# EAGLE board Eddy_ESC (EAGLE 9.5.2)
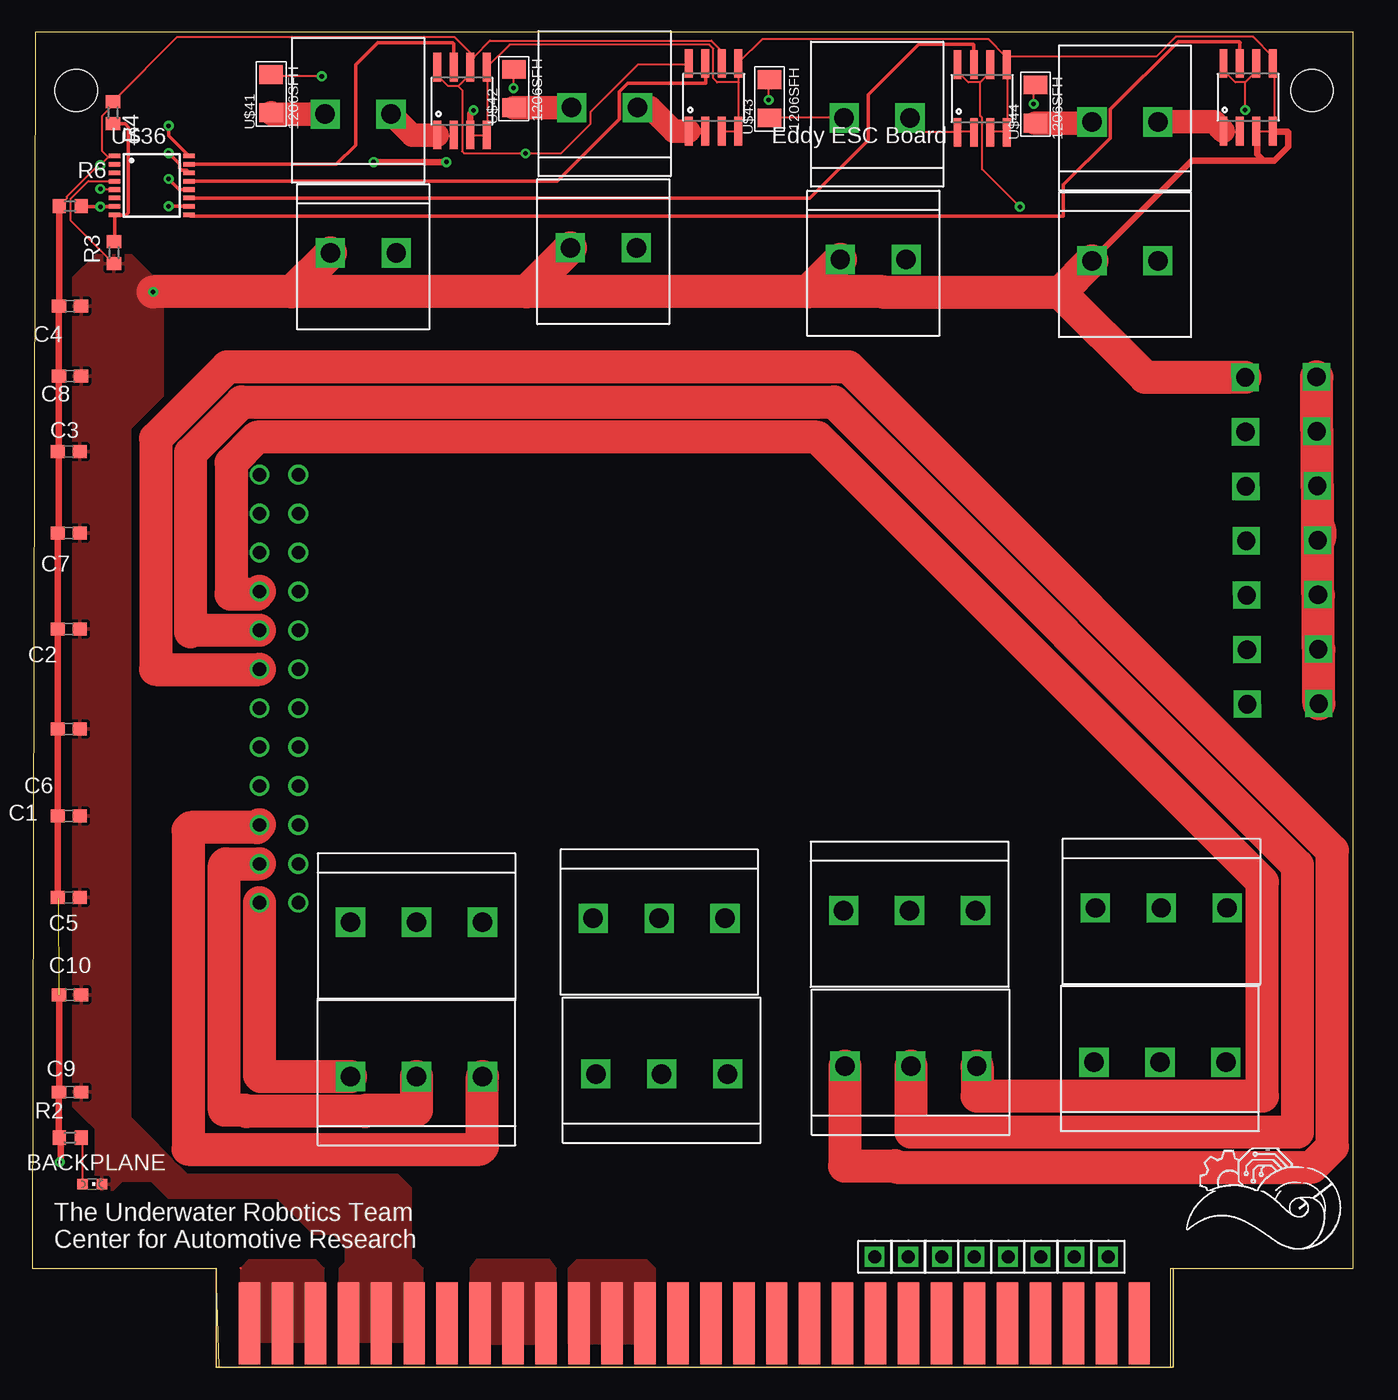
[diagram p0: board, top side]
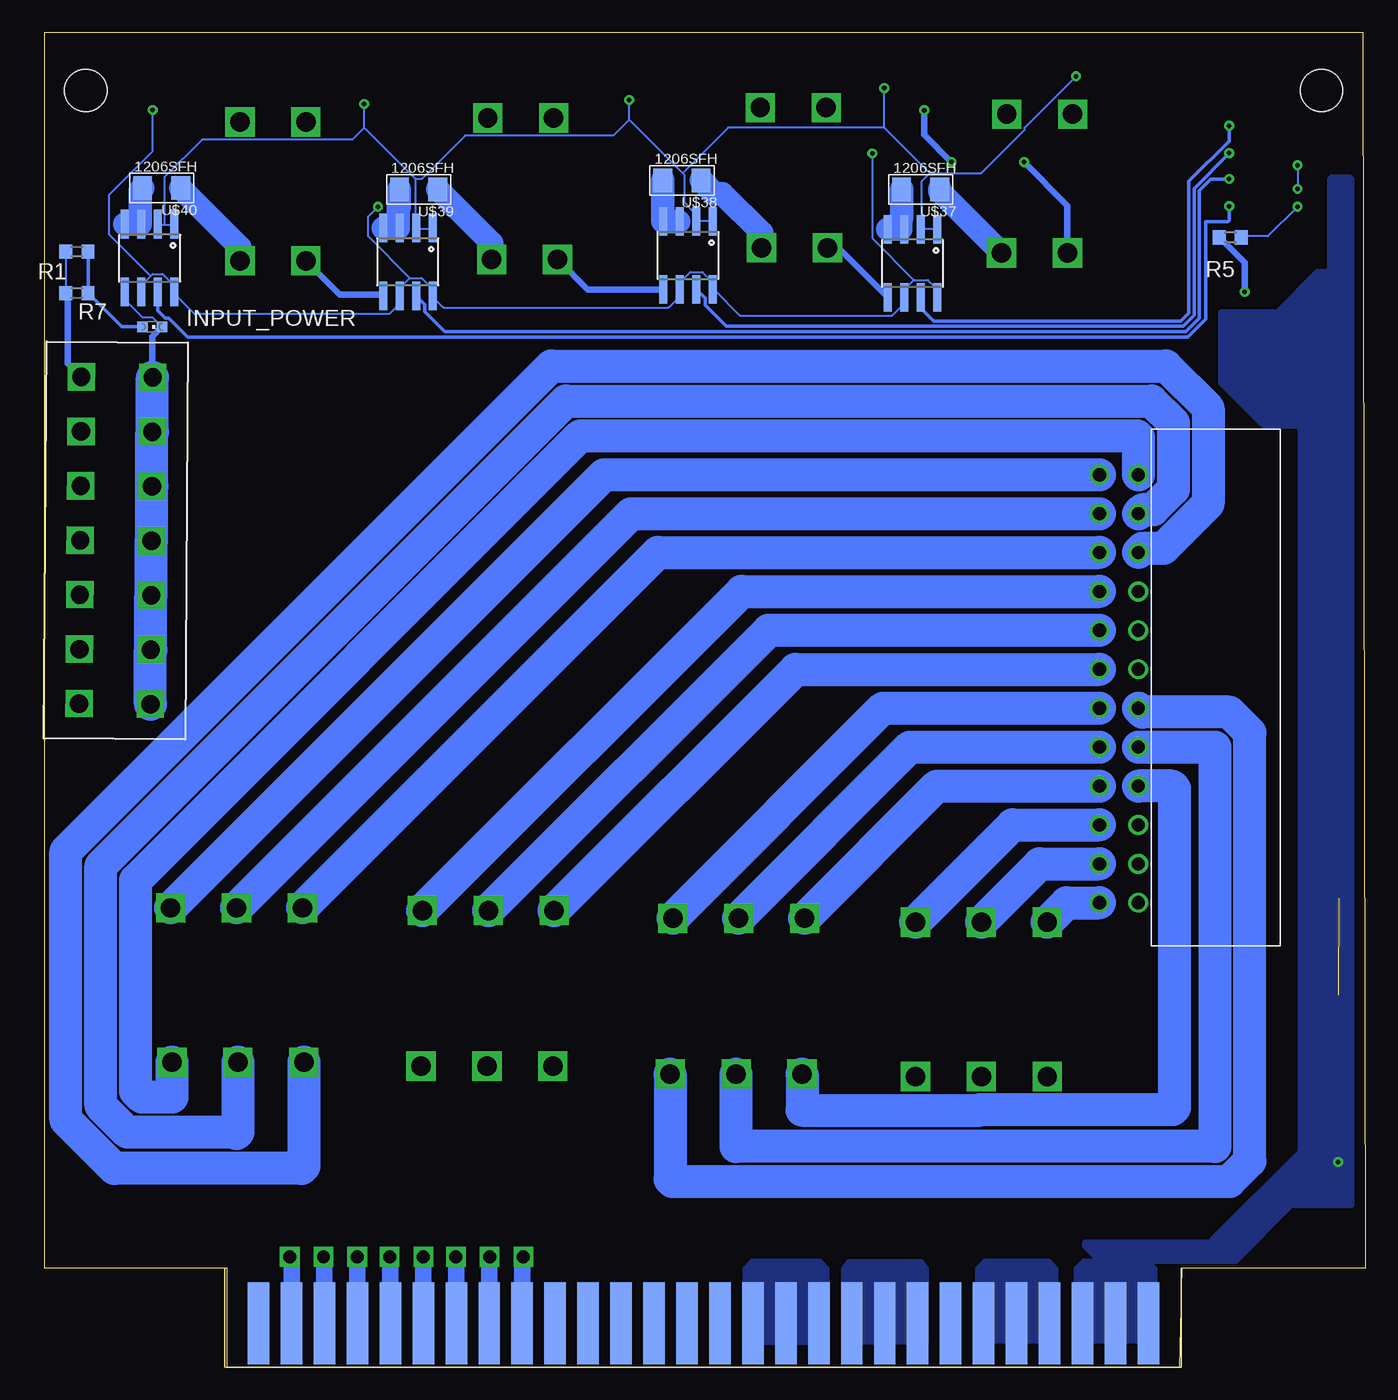
[diagram p1: board, bottom side, seen from below]

Size 101.8 x 102.9 mm. Coordinates in mm from the lower left corner, seen from the top.
Outline: 0,7.6 14.14,7.6 14.34,0 87.73,0 87.73,7.62 101.8,7.62 101.8,102.9 0.2,102.9 0,7.6
Copper layers (1*16): Top 0.035mm / dielectric 1.5mm / Bottom 0.035mm
Design rules "default *": minimum track width 6mil, minimum drill 0.35mm, track to track 6mil, track to pad 6mil, pad to pad 6mil, via to via 6mil, smd to smd 6mil, copper to edge 0.00508125mm, drill to drill 6mil, minimum pad ring 10mil, minimum via ring 8mil, stop-mask expansion 4mil, vias tented up to drill 0mil, thermal gap 10mil
Holes 3.26 mm at 3.38,98.42 98.62,98.42

## Footprints (pad centres in the part's own frame; a part is rotated, then mirrored left to right if it is on the bottom)
CHIPLED_0603 = smd 0.8 x 0.8: A 0,-0.75; C 0,0.75
C0603 = smd 1.1 x 1: 1 -0.85,0; 2 0.85,0
R0603 = smd 1 x 1.1: 1 -0.85,0; 2 0.85,0
5530843-6-BOARDFINGERS = smd 1.651 x 6.35 bottom: 1 0.826,3.375; 2 3.365,3.375; 3 5.905,3.375; 4 8.445,3.375; 5 10.986,3.375; 6 13.525,3.375; 7 16.066,3.375; 8 18.605,3.375; 9 21.145,3.375; 10 23.686,3.375; 11 26.226,3.375; 12 28.765,3.375; 13 31.305,3.375; 14 33.846,3.375; 15 36.386,3.375; 16 38.925,3.375; 17 41.465,3.375; 18 44.005,3.375; 19 46.545,3.375; 20 49.086,3.375; 21 51.626,3.375; 22 54.166,3.375; 23 56.706,3.375; 24 59.245,3.375; 25 61.785,3.375; 26 64.326,3.375; 27 66.865,3.375; 28 69.406,3.375 | smd 1.651 x 6.35: 29 69.406,3.375; 30 66.865,3.375; 31 64.326,3.375; 32 61.785,3.375; 33 59.245,3.375; 34 56.706,3.375; 35 54.166,3.375; 36 51.626,3.375; 37 49.086,3.375; 38 46.545,3.375; 39 44.005,3.375; 40 41.465,3.375; 41 38.925,3.375; 42 36.386,3.375; 43 33.846,3.375; 44 31.305,3.375; 45 28.765,3.375; 46 26.226,3.375; 47 23.686,3.375; 48 21.145,3.375; 49 18.605,3.375; 50 16.066,3.375; 51 13.525,3.375; 52 10.986,3.375; 53 8.445,3.375; 54 5.905,3.375; 55 3.365,3.375; 56 0.826,3.375
1711738 = drill 1.5 square: BLUE -5.08,0; GREEN 0,0; WHITE 5.08,0
24PINCONVERTER = drill 1.02: 1,BLUE 3,0; 1,GREEN 3,3; 1,WHITE 3,6; 2,BLUE 0,6; 2,GREEN 0,3; 2,WHITE 0,0; 3,BLUE 3,9; 3,GREEN 3,12; 3,WHITE 3,15; 4,BLUE 0,15; 4,GREEN 0,12; 4,WHITE 0,9; 5,BLUE 3,18; 5,GREEN 3,21; 5,WHITE 3,24; 6,BLUE 0,24; 6,GREEN 0,21; 6,WHITE 0,18; 7,BLUE 3,27; 7,GREEN 3,30; 7,WHITE 3,33; 8,BLUE 0,33; 8,GREEN 0,30; 8,WHITE 0,27
14PIN_VERT = drill 1.4 square: 1+ 0,0; 1- 5.5,0; 2+ 0,4.2; 2- 5.5,4.2; 3+ 0,8.4; 3- 5.5,8.4; 4+ 0,12.6; 4- 5.5,12.6; 5+ 0,16.8; 5- 5.5,16.8; 6+ 0,21; 6- 5.5,21; 7+ 0,25.2; 7- 5.5,25.2
MALE1PINHEADER = drill 1 square: PWM 0,0
1711725 = drill 1.5 square: BLACK -2.54,0; RED 2.54,0
SOIC-8 = smd 0.61 x 2.21: BW_SEL 0.635,2.616; GND 1.905,2.616; IP+1 -1.905,-2.616; IP+2 -0.635,-2.616; IP-1 0.635,-2.616; IP-2 1.905,-2.616; VCC -1.905,2.616; VIOUT -0.635,2.616
TSSOP-16 = smd 0.9 x 0.35: A0 -2.875,-1.625; A1 -2.875,-2.275; GND -2.875,0.325; IN0 2.875,2.275; IN1 2.875,1.625; IN2 2.875,0.975; IN3 2.875,0.325; IN4 2.875,-0.325; IN5 2.875,-0.975; IN6 2.875,-1.625; IN7 2.875,-2.275; INT -2.875,-0.975; SCL -2.875,0.975; SDA -2.875,1.625; V+ -2.875,-0.325; VREF -2.875,2.275
1206SFH = smd 1.448 x 1.803: P$1 0,0; P$2 2.946,0

## Placement (x,y rotation side)
BACKPLANE  [CHIPLED_0603]  4.6,14.1 270 top
C1  0.1uF  [C0603]  2.8,42.5 180 top
C2  0.1uF  [C0603]  2.8,56.9 180 top
C3  0.1uF  [C0603]  2.8,70.6 180 top
C4  0.1uF  [C0603]  2.9,81.8 180 top
C5  0.1uF  [C0603]  2.8,36.2 180 top
C6  0.1uF  [C0603]  2.8,49.2 180 top
C7  0.1uF  [C0603]  2.8,64.3 180 top
C8  0.1uF  [C0603]  2.9,76.4 180 top
C9  0.1uF  [C0603]  2.9,21.2 0 top
C10  1uF  [C0603]  2.9,28.7 0 top
INPUT_POWER  [CHIPLED_0603]  93.5,80.2 270 bottom
R1  900  [R0603]  99.3,86 0 bottom
R2  5  [R0603]  2.9,17.7 0 top
R3  900  [R0603]  6.28,85.92 90 top
R4  900  [R0603]  6.2,96.7 270 top
R5  900  [R0603]  10.4,87.1 180 bottom
R6  900  [R0603]  2.9,89.5 0 top
R7  900  [R0603]  99.3,82.8 0 bottom
U$1  5530843-EDGE  [5530843-6-BOARDFINGERS]  15.9,0 0 top
U$2  1711738  [1711738]  29.6,34.3 180 top
U$3  1711738  [1711738]  48.5,22.6 0 top
U$4  1711738  [1711738]  48.3,34.6 180 top
U$5  1711738  [1711738]  67.7,23.2 0 top
U$6  1711738  [1711738]  67.6,35.2 180 top
U$7  1711738  [1711738]  86.9,23.5 0 top
U$8  1711738  [1711738]  87,35.4 180 top
U$9  1711738  [1711738]  29.6,22.4 0 top
U$10  24PINCONVERTER  [24PINCONVERTER]  20.5,35.8 0 bottom
U$11  14PIN_VERT  [14PIN_VERT]  99.14,51.15 359.6 bottom
U$12  MALE1PINHEADER  [MALE1PINHEADER]  64.9,8.5 0 top
U$13  MALE1PINHEADER  [MALE1PINHEADER]  67.5,8.5 0 top
U$14  MALE1PINHEADER  [MALE1PINHEADER]  70.1,8.5 0 top
U$15  MALE1PINHEADER  [MALE1PINHEADER]  75.2,8.5 0 top
U$16  MALE1PINHEADER  [MALE1PINHEADER]  72.6,8.5 0 top
U$17  MALE1PINHEADER  [MALE1PINHEADER]  77.7,8.5 0 top
U$18  MALE1PINHEADER  [MALE1PINHEADER]  80.3,8.5 0 top
U$19  MALE1PINHEADER  [MALE1PINHEADER]  82.9,8.5 0 top
U$20  1711725  [1711725]  25.1,96.6 180 top
U$21  1711725  [1711725]  44.1,97.1 180 top
U$22  1711725  [1711725]  65.1,96.3 180 top
U$23  1711725  [1711725]  84.2,96 180 top
U$24  1711725  [1711725]  25.5,85.9 0 top
U$25  1711725  [1711725]  44,86.3 0 top
U$26  1711725  [1711725]  64.8,85.4 0 top
U$27  1711725  [1711725]  84.2,85.3 0 top
U$28  ACS722  [SOIC-8]  33.1,97.6 0 top
U$29  ACS722  [SOIC-8]  52.5,97.9 0 top
U$30  ACS722  [SOIC-8]  73.2,97.8 0 top
U$31  ACS722  [SOIC-8]  93.7,97.9 0 top
U$32  ACS722  [SOIC-8]  34.9,85.1 180 bottom
U$33  ACS722  [SOIC-8]  52.2,85.7 180 bottom
U$34  ACS722  [SOIC-8]  73.8,85.2 180 bottom
U$35  ACS722  [SOIC-8]  93.7,85.5 180 bottom
U$36  ADC128D818  [TSSOP-16]  9.2,91.1 0 top
U$37  1206SFH  [1206SFH]  32.8,90.8 180 bottom
U$38  1206SFH  [1206SFH]  51.2,91.5 180 bottom
U$39  1206SFH  [1206SFH]  71.5,90.8 180 bottom
U$40  1206SFH  [1206SFH]  91.3,90.9 180 bottom
U$41  1206SFH  [1206SFH]  18.4,96.7 90 top
U$42  1206SFH  [1206SFH]  37.1,97.1 90 top
U$43  1206SFH  [1206SFH]  56.8,96.3 90 top
U$44  1206SFH  [1206SFH]  77.3,95.9 90 top

## Library data of the parts
BACKPLANE INPUT_POWER = led
C1-C10 = rcl; SPICEPREFIX: C
R1-R7 = resistor
U$1 = 5530843-6
U$2-U$9 U$20-U$27 = Screw_Terminals
U$10 = 24_Pin_Connector
U$11 = 14_Pin_Connector_Vert
U$12-U$19 = Male_Header_1Pin
U$28-U$35 = ACS722
U$36 = ADC128D818
U$37-U$44 = 1206SFH

## Nets
+3V3: C1.2 C2.2 C3.2 C4.2 C5.2 C6.2 C7.2 C8.2 C9.1 C10.1 R2.1 R4.1 R6.1 U$1.1 U$1.2 U$1.3 U$1.54 U$1.55 U$1.56 U$28.BW_SEL U$28.VCC U$29.BW_SEL U$29.VCC U$30.BW_SEL U$30.VCC U$31.BW_SEL U$31.VCC U$32.BW_SEL U$32.VCC U$33.BW_SEL U$33.VCC U$34.BW_SEL U$34.VCC U$35.BW_SEL U$35.VCC U$36.V+ U$36.VREF
+5V: U$1.11 U$1.12 U$1.13 U$1.44 U$1.45 U$1.46
BALANCED: U$32.IP+1 U$32.IP+2 U$33.IP+1 U$33.IP+2 U$34.IP+1 U$34.IP+2 U$35.IP+1 U$35.IP+2 U$41.P$2 U$42.P$2 U$43.P$2 U$44.P$2
BALANCED+/2.1B: R1.1 R7.1 U$11.1+ U$11.2+ U$11.3+ U$11.4+ U$11.5+ U$11.6+ U$11.7+
GND: BACKPLANE.C C1.1 C2.1 C3.1 C4.1 C5.1 C6.1 C7.1 C8.1 C9.2 C10.2 INPUT_POWER.C R3.1 R5.2 U$1.4 U$1.5 U$1.6 U$1.8 U$1.9 U$1.10 U$1.47 U$1.48 U$1.49 U$1.51 U$1.52 U$1.53 U$11.1- U$11.2- U$11.3- U$11.4- U$11.5- U$11.6- U$11.7- U$24.BLACK U$25.BLACK U$26.BLACK U$27.BLACK U$28.GND U$28.IP-1 U$28.IP-2 U$29.GND U$29.IP-1 U$29.IP-2 U$30.GND U$30.IP-1 U$30.IP-2 U$31.GND U$31.IP-1 U$31.IP-2 U$32.GND U$33.GND U$34.GND U$35.GND U$36.GND
N$1: U$9.BLUE U$10.1,BLUE
N$2: U$9.GREEN U$10.1,GREEN
N$3: U$9.WHITE U$10.1,WHITE
N$4: U$2.BLUE U$10.2,BLUE
N$5: U$2.WHITE U$10.2,WHITE
N$6: U$2.GREEN U$10.2,GREEN
N$7: U$3.BLUE U$10.3,BLUE
N$8: U$3.GREEN U$10.3,GREEN
N$9: U$3.WHITE U$10.3,WHITE
N$10: U$4.BLUE U$10.4,BLUE
N$11: U$4.GREEN U$10.4,GREEN
N$12: U$4.WHITE U$10.4,WHITE
N$13: U$5.BLUE U$10.5,BLUE
N$14: U$5.GREEN U$10.5,GREEN
N$15: U$5.WHITE U$10.5,WHITE
N$16: U$6.WHITE U$10.6,WHITE
N$17: U$6.GREEN U$10.6,GREEN
N$18: U$6.BLUE U$10.6,BLUE
N$19: U$7.BLUE U$10.7,BLUE
N$20: U$7.GREEN U$10.7,GREEN
N$21: U$7.WHITE U$10.7,WHITE
N$22: U$8.WHITE U$10.8,WHITE
N$23: U$8.GREEN U$10.8,GREEN
N$24: U$8.BLUE U$10.8,BLUE
N$25: U$1.20 U$12.PWM
N$26: U$1.21 U$13.PWM
N$27: U$1.22 U$14.PWM
N$28: U$1.23 U$16.PWM
N$29: U$1.24 U$15.PWM
N$30: U$1.25 U$17.PWM
N$31: U$1.26 U$18.PWM
N$32: U$1.27 U$19.PWM
N$33: INPUT_POWER.A R1.2 R7.2
N$34: BACKPLANE.A R2.2
N$35: U$20.BLACK U$28.IP+1 U$28.IP+2
N$36: U$21.BLACK U$29.IP+1 U$29.IP+2
N$37: U$34.VIOUT U$36.IN4
N$38: U$29.VIOUT U$36.IN3
N$39: U$22.BLACK U$30.IP+1 U$30.IP+2
N$40: U$33.IP-1 U$33.IP-2 U$38.P$2
N$41: U$34.IP-1 U$34.IP-2 U$39.P$2
N$42: U$31.VIOUT U$36.IN7
N$43: U$35.VIOUT U$36.IN6
N$45: U$30.VIOUT U$36.IN5
N$46: U$32.IP-1 U$32.IP-2 U$37.P$2
N$47: U$35.IP-1 U$35.IP-2 U$40.P$2
N$48: U$33.VIOUT U$36.IN2
N$49: U$28.VIOUT U$36.IN1
N$50: U$32.VIOUT U$36.IN0
N$51: U$24.RED U$37.P$1
N$52: U$25.RED U$38.P$1
N$53: U$26.RED U$39.P$1
N$54: U$27.RED U$40.P$1
N$55: U$20.RED U$41.P$1
N$56: U$21.RED U$42.P$1
N$57: U$22.RED U$43.P$1
N$58: U$23.RED U$44.P$1
N$59: R5.1 R6.2 U$36.A0
N$59: R5.1 R6.2 U$36.A0
N$60: R3.2 R4.2 U$36.A1
N$60: R3.2 R4.2 U$36.A1
N$61: U$23.BLACK U$31.IP+1 U$31.IP+2
N$61: U$36.SDA
N$62: U$36.SCL
SCL/1.2E: U$36.SCL
SCL/2.4E: U$1.31
SDA/1.2E: U$36.SDA
SDA/2.4E: U$1.32

## Tracks (layer width: path | path; a pad name or v marks a point on that pad's centre or on a via)
+3V3  (via drill 0.35)  (1 unrouted)
  Top 0.152: 93.47,99.06 92.71,99.06 91.95,99.82 91.95,100.43 U$31.VCC | 93.47,99.06 94.23,99.82 94.23,100.43 U$31.BW_SEL | 73.05,99.06 72.13,99.06 71.37,99.82 71.37,100.28 U$30.VCC | 73.05,99.06 73.81,99.82 73.81,100.28 U$30.BW_SEL | 73.05,99.06 73.05,96.47 73.2,96.32 73.2,92.35 v76.09,89.46 | v93.47,96.93 93.47,99.06 | 2.03,17.83 R2.1 2.18,17.68 | 2.03,21.18 C9.1 2.03,21.34 | 2.03,36.27 C5.2 2.03,36.12 | 2.03,42.37 C1.2 2.03,42.52 | 2.03,49.07 C6.2 2.03,49.23 | 2.03,28.8 C10.1 2.03,28.65 | 16.05,7.62 16.07,7.62 | 32.81,98.75 32.05,98.75 31.29,99.52 31.29,100.13 U$28.VCC | 32.81,98.75 33.73,99.67 33.73,100.13 U$28.BW_SEL | 32.81,98.75 33.12,98.45 33.12,93.73 33.27,93.57 v38,93.57 40.74,93.57 43.02,95.86 43.02,96.77 46.68,100.43 50.49,100.43 U$29.VCC | 34.03,101.04 33.88,100.89 33.88,100.28 U$28.BW_SEL | 34.03,101.04 35.25,102.26 52.32,102.26 53.08,101.5 53.08,100.58 U$29.BW_SEL | v5.23,90.83 6.3,90.83 U$36.V+ | 5.84,93.27 v5.23,92.66 5.08,92.66 2.64,90.22 2.64,90.07 2.24,89.67 2.18,89.61 R6.1 2.03,89.46 | 5.84,93.27 6.3,93.27 U$36.VREF | 5.84,93.27 5.38,93.73 5.38,96.47 6.14,97.23 6.14,97.54 R4.1 6.3,97.69 11.17,102.56 32.51,102.56 34.03,101.04 | 2.03,57 C2.2 2.03,56.84 | 2.03,64.16 C7.2 2.03,64.31 | 2.03,70.71 C3.2 2.03,70.56 | 2.03,76.35 C8.2 2.03,76.5 | 2.03,81.69 C4.2 2.03,81.84 | 34.03,101.04 U$28.BW_SEL
  Top 0.508: 2.18,17.68 2.18,15.88 v2.1,15.8 | 2.03,17.83 2.03,21.18 | C9.1 2.05,28.78 2.03,28.8 | C5.2 1.95,42.44 2.03,42.52 | C1.2 1.95,49.15 2.03,49.23 | C6.2 C2.2 1.95,64.08 2.03,64.16 | C7.2 2.03,64.38 2.03,70.56 | C3.2 2.03,70.68 2.03,76.42 | C8.2 2.03,76.42 | 2.03,76.42 2.03,81.84 | C4.2 2.05,89.48 2.24,89.67
  Bottom 0.152: 34.8,83.82 33.73,83.82 33.12,83.21 33.12,82.6 U$32.VCC | 34.8,83.82 35.4,83.21 35.4,82.6 U$32.BW_SEL 35.56,82.45 35.56,81.99 36.47,81.08 48.21,81.08 50.19,83.06 U$33.VCC 50.34,83.21 50.34,83.67 51.1,84.43 52.02,84.43 52.78,83.67 52.78,83.21 U$33.BW_SEL 52.93,83.06 52.93,82.45 53.69,81.69 71.07,81.69 71.83,82.45 U$34.VCC 71.98,82.6 71.98,83.21 72.74,83.97 73.66,83.97 | 73.66,83.97 74.42,83.21 74.42,82.6 U$34.BW_SEL 74.57,82.45 74.57,81.84 75.18,81.23 90.27,81.23 91.79,82.75 U$35.VCC 91.95,82.91 91.95,83.52 92.71,84.28 93.47,84.28 93.62,84.12 | 93.62,84.12 94.23,83.52 94.23,82.91 U$35.BW_SEL | v76.09,89.46 76.86,88.7 76.86,87.17 73.66,83.97 | v93.47,96.93 93.47,93.73 96.82,90.37 96.82,87.33 93.62,84.12 | v5.23,92.66 v5.23,90.83 | 34.8,83.82 38,87.02 v38,93.57
  pour Bottom (no thermals): 16.07,7.62 16.71,8.26 21.79,8.26 22.43,7.62 22.43,1.91 16.07,1.91
  pour Top (no thermals): 16.07,7.62 16.71,8.26 21.79,8.26 22.43,7.62 22.43,1.91 16.07,1.91
  pour Bottom: 19.8,7.5 19.1,8.2 10,8.2 5.7,12.5 1.1,12.5 1.1,91.6 1.2,91.7 2.6,91.7 2.7,91.6 2.7,84.6 2.5,84.4 3.7,84.4 6.8,81.3 11.1,81.3 11.1,75.9 11,75.8 7.8,72.6 5,72.6 5,16.6 11.6,10 12,9.6 21.6,9.6 21.6,9.3
+5V
  pour Top (no thermals): 41.35,1.78 41.35,7.62 41.98,8.26 47.32,8.26 47.95,7.62 47.95,1.78
  pour Bottom (no thermals): 41.35,1.78 41.35,7.62 41.98,8.26 47.32,8.26 47.95,7.62 47.95,1.78
BALANCED  (via drill 0.35)
  Top 0.152: v77.16,97.38 77.16,98.75 U$44.P$2 | v56.74,97.69 56.74,99.21 U$43.P$2 | v22.3,99.52 18.49,99.52 U$41.P$2 | v37.08,98.6 37.08,99.97 U$42.P$2
  Bottom 0.152: 92.55,88.09 93.01,88.09 U$35.IP+2 | 92.55,88.09 91.95,88.09 U$35.IP+1 | 77.16,95.56 v77.16,97.38 | 73.2,91.59 77.16,95.56 | 73.2,91.59 73.2,87.94 U$34.IP+2 73.05,87.78 71.98,87.78 U$34.IP+1 | 92.55,88.09 92.55,91.75 89.66,94.64 78.08,94.64 77.16,95.56 | 56.74,96.16 v56.74,97.69 | 52.63,92.05 52.47,91.9 52.47,89.76 51.71,89 51.71,88.39 U$33.IP+2 51.56,88.39 50.34,88.39 U$33.IP+1 | 52.63,92.05 56.74,96.16 | v22.3,99.52 26.26,95.56 26.26,95.4 29.61,92.05 33.58,92.05 | 33.58,92.05 34.19,91.44 34.19,87.78 | 34.19,87.78 U$32.IP+2 34.19,87.78 | 37.08,95.56 v37.08,98.6 | 33.58,92.05 37.08,95.56 | 34.19,87.78 33.12,87.78 U$32.IP+1 | 52.63,92.05 49.12,95.56 37.08,95.56 | 73.2,91.59 72.74,91.59 69.39,94.94 57.96,94.94 56.74,96.16
BALANCED+/2.1B
  Top 2.54: U$11.1+ 99.14,55.32 U$11.2+ 99.11,59.52 U$11.3+ 99.08,64.48 99.2,64.6 99.2,63.89 U$11.4+ 99.05,67.92 U$11.5+ 99.02,72.11 U$11.6+ 98.99,76.31 U$11.7+
  Bottom 0.152: R1.1 100.17,85.95 100.17,82.91 100.16,82.83 R7.1 100.02,82.75 | 99.11,76.35 U$11.7+
  Bottom 0.508: U$11.7+ 100,77.38 100,82.67 100.16,82.83
GND  (via drill 0.35)
  Top 0.152: U$30.IP-1 73.96,95.25 75.03,95.25 U$30.IP-2 75.18,95.25 75.18,100.28 U$30.GND | U$28.IP-1 33.88,94.94 34.95,94.94 U$28.IP-2 35.1,95.1 35.1,100.13 U$28.GND 35.1,100.28 36.78,101.96 52.17,101.96 52.47,101.65 52.47,99.36 52.78,99.06 54.45,99.06 | U$29.IP-1 53.23,95.25 54.3,95.25 U$29.IP-2 54.45,95.4 54.45,99.06 | 54.45,99.06 54.45,100.43 U$29.GND 54.45,100.58 56.28,102.41 73.66,102.41 75.03,101.04 | 75.03,101.04 75.03,100.43 U$30.GND | 93.62,63.7 U$11.4- | 93.62,72.08 U$11.6- | 93.62,67.97 U$11.5- | 94.23,94.64 94.23,95.25 U$31.IP-1 94.38,95.25 94.4,95.25 95.6,95.25 U$31.IP-2 95.76,95.4 95.76,100.43 U$31.GND 95.6,100.58 95.6,101.04 94.08,102.56 88.14,102.56 86.61,101.04 75.03,101.04 | 75.03,101.04 U$30.GND | 5.23,14.17 BACKPLANE.C 5.38,14.02 | 3.86,21.18 C9.2 3.71,21.34 | 3.71,36.27 C5.1 3.71,36.12 | 3.71,42.37 C1.1 3.71,42.52 | 3.71,49.07 C6.1 3.71,49.23 | 3.71,28.8 C10.2 3.71,28.65 | 3.71,57 C2.1 3.71,56.84 | 3.71,64.16 C7.1 3.71,64.31 | 3.71,70.71 C3.1 3.71,70.56 | 3.71,76.35 C8.1 3.71,76.5 | U$36.GND 6.3,91.44 4.32,91.44 2.94,90.07 2.94,88.39 6.14,85.19 R3.1 | 3.86,81.84 C4.1 3.71,81.69 | 6.14,85.04 R3.1 | 6.3,85.19 R3.1
  Top 0.508: U$28.IP-1 33.73,96.64 v34,96.9 | v31.9,92.9 v26.3,92.9 | U$27.BLACK 89.36,93 94.9,93 | 95.6,95.25 96.75,95.25 96.8,95.2 96.8,94.1 95.7,93 94.9,93 | 94.9,93 94.4,93.5 94.4,95.25
  Top 2.54: U$24.BLACK 19.96,82.9 | 19.96,82.9 v9.3,82.9 | U$25.BLACK 38.06,82.9 | 38.06,82.9 19.96,82.9 | U$26.BLACK 59.76,82.9 | 59.76,82.9 38.06,82.9 | 59.76,82.9 65.58,82.9 65.63,82.85 79.21,82.85 | U$27.BLACK 79.21,82.85 | 79.21,82.85 85.76,76.31 U$11.7-
  Bottom 0.152: 92.86,80.16 INPUT_POWER.C 92.86,80.31 93.47,80.92 94.23,80.92 95.6,82.3 95.6,82.75 U$35.GND | 75.79,82.6 U$34.GND | 54.15,83.21 U$33.GND 54,83.21 54,83.67 | R5.2 11.17,87.02
  Bottom 0.508: 11.17,87.02 9.3,85.15 v9.3,82.9 | v34,96.9 34,95 v31.9,92.9 | v26.3,92.9 22.96,89.56 U$24.BLACK | U$34.GND 75.82,82.7 79.06,82.7 U$27.BLACK | INPUT_POWER.C 93.49,79.46 93.49,76.28 | U$33.GND 59.94,83.08 U$26.BLACK | U$32.GND 40.62,86.3 U$25.BLACK
  Bottom 2.54: U$11.1- 93.64,55.28 U$11.2- 93.61,59.48 U$11.3- 93.58,63.68 U$11.4- 93.55,67.88 U$11.5- 93.52,72.08 U$11.6- 93.49,76.28 U$11.7-
  pour Top (no thermals): 23.7,7.62 24.33,8.26 29.41,8.26 30.04,7.62 30.04,1.91 23.7,1.91
  pour Bottom (no thermals): 23.7,7.62 24.33,8.26 29.41,8.26 30.04,7.62 30.04,1.91 23.7,1.91
  pour Top (no thermals): 33.86,1.78 40.33,1.78 40.33,7.62 39.82,8.26 34.24,8.26 33.73,7.62 33.73,1.91
  pour Bottom (no thermals): 33.73,7.62 33.73,1.91 33.86,1.78 40.21,1.78 40.21,4.06 40.21,5.71 40.33,5.84 40.33,7.62 39.82,8.26 34.24,8.26
  pour Top: 25,7.4 27,7.4 27.1,7.5 26.6,8 26.4,8 25.9,8 25.6,7.7
  pour Top: 24.2,7.2 24.2,9.3 23.2,10.3 21.7,10.3 18.9,13.1 10.5,13.1 9.2,14.4 6.9,14.4 6.2,13.7 5,13.7 4.9,13.8 4.9,18.4 4,19.3 3.2,20.1 3.2,23.9 3.2,84 4.9,85.7 7.6,85.7 8.3,85 10,83.3 10,74.9 7.5,72.4 7.5,67.3 7.5,19.2 11.9,14.8 28.1,14.8 29.1,13.8 29.1,7.7 29.4,7.4 24.3,7.4
N$1
  Top 2.54: U$10.1,BLUE 17.5,22.5 17.6,22.4 U$9.BLUE
N$2
  Top 2.54: U$9.GREEN 29.6,19.8 25.73,19.8 25.63,19.71 16.48,19.71 16.39,19.8 14.8,19.8 14.8,38.7 14.9,38.8 U$10.1,GREEN
N$3
  Top 2.54: U$10.1,WHITE 17.3,41.6 12.2,41.6 12,41.4 12,16.8 34.5,16.8 34.68,16.98 U$9.WHITE
N$4
  Bottom 2.54: U$2.BLUE 27.18,41.8 U$10.2,BLUE
N$5
  Bottom 2.54: U$2.WHITE 23.02,35.8 U$10.2,WHITE
N$6
  Bottom 2.54: U$2.GREEN 25.1,38.8 U$10.2,GREEN
N$7
  Bottom 2.54: U$3.BLUE 43.42,19.82 43.4,19.8 29.7,19.8 29.65,19.85 14.85,19.85 14.7,20 14.7,44.6 14.9,44.8 U$10.3,BLUE
N$8
  Bottom 2.54: U$10.3,GREEN 11.6,47.8 11.6,17 48.5,17 U$3.GREEN
N$9
  Bottom 2.54: U$3.WHITE 53.58,14.48 53.41,14.31 10.48,14.31 8.91,15.88 8.91,48.91 10.48,50.49 17.19,50.49 U$10.3,WHITE
N$10
  Bottom 2.54: U$4.BLUE 37.18,50.8 U$10.4,BLUE
N$11
  Bottom 2.54: U$4.GREEN 35.1,47.8 U$10.4,GREEN
N$12
  Bottom 2.54: U$4.WHITE 33.02,44.8 U$10.4,WHITE
N$13
  Top 2.54: U$5.BLUE 62.62,15.52 | 62.62,15.52 62.6,15.5 | 62.62,15.52 66.47,15.52 66.59,15.41 98.62,15.41 100.19,16.98 100.19,39.81 62.9,77.1 15,77.1 9.5,71.6 9.5,53.8 U$10.5,BLUE
N$14
  Top 2.54: U$5.GREEN 67.7,18.1 97.5,18.1 97.5,38.69 61.79,74.41 16.11,74.41 12.19,70.48 12.19,56.7 12.29,56.8 U$10.5,GREEN
N$15
  Top 2.54: U$5.WHITE 72.8,23.18 72.8,20.9 94.8,20.9 94.8,37.4 60.5,71.7 17.31,71.7 15.31,69.71 15.31,59.61 15.3,59.6 17.3,59.6 U$10.5,WHITE
N$16
  Bottom 2.54: U$6.WHITE 43.92,53.8 U$10.6,WHITE
N$17
  Bottom 2.54: U$10.6,GREEN 46,56.8 U$6.GREEN
N$18
  Bottom 2.54: U$6.BLUE 48.08,59.8 U$10.6,BLUE
N$19
  Bottom 2.54: U$10.7,BLUE 17.19,63.11 15.58,63.11 12.11,66.57 12.11,73.93 15.37,77.19 62.73,77.19 100.16,39.76 100.16,19.04 96.42,15.31 81.99,15.31 81.8,15.5 81.82,15.52 U$7.BLUE
N$20
  Bottom 2.54: U$10.7,GREEN 17.19,66.11 16.38,66.11 14.81,67.69 14.81,72.81 16.48,74.49 61.62,74.49 97.47,38.64 97.47,20.16 95.42,18.11 87.11,18.11 87,18 86.9,18.1 U$7.GREEN
N$21
  Bottom 2.54: U$10.7,WHITE 17.5,71.7 17.6,71.8 60.5,71.8 94.77,37.53 94.77,21.27 94.3,20.8 92,20.8 91.98,20.82 U$7.WHITE
N$22
  Bottom 2.54: U$8.WHITE 54.52,62.8 U$10.8,WHITE
N$23
  Bottom 2.54: U$8.GREEN 56.6,65.8 U$10.8,GREEN
N$24
  Bottom 2.54: U$8.BLUE 58.68,68.8 U$10.8,BLUE
N$25
  Bottom 1.27: U$1.20 64.98,8.41 U$12.PWM
N$26
  Bottom 1.27: U$1.21 67.53,8.47 U$13.PWM
N$27
  Bottom 1.27: U$1.22 70.06,8.47 U$14.PWM
N$28
  Bottom 1.27: U$1.23 U$16.PWM
N$29
  Bottom 1.27: U$1.24 75.14,8.45 U$15.PWM
N$30
  Bottom 1.27: U$1.25 77.69,8.49 U$17.PWM
N$31
  Bottom 1.27: U$1.26 80.23,8.43 U$18.PWM
N$32
  Bottom 1.27: U$1.27 82.77,8.37 U$19.PWM
N$33
  Bottom 0.254: INPUT_POWER.A 95.85,80.2 R7.2 R1.2
N$34
  Top 0.152: BACKPLANE.A 3.86,14.17 3.86,17.68 R2.2
N$35
  Top 0.152: U$28.IP+2 32.36,94.94 32.05,94.94 U$28.IP+1
  Top 1.8: U$20.BLACK 29.26,94.98 U$28.IP+1
N$36
  Top 0.508: U$29.IP+1 U$29.IP+2
  Top 1.8: U$21.BLACK 47.6,97.1 49.42,95.28 U$29.IP+1
N$37  (via drill 0.35)
  Top 0.254: U$36.IN4 11.32,90.78 v10.5,91.6
  Bottom 0.254: U$34.VIOUT 72.48,81.9 72.48,81.36 70.95,79.84 13.84,79.84 12.79,80.89 12.79,90.69 12.8,90.7 11.9,91.6 v10.5,91.6
N$38
  Top 0.254: U$36.IN3 40.46,91.42 45.24,96.2 45.24,98.34 45.9,99 51.9,99 51.9,100 | 51.9,100 51.9,100.6 | 51.9,100 51.87,100.03 U$29.VIOUT
N$39
  Top 0.152: U$30.IP+2 72.44,95.25 71.37,95.25 U$30.IP+1 71.22,95.25 68.63,95.25 67.71,96.16 U$22.BLACK
N$40
  Bottom 0.152: U$33.IP-1 52.93,88.39 52.93,88.32
  Bottom 1.8: U$38.P$2 54.15,88.36 U$33.IP-2 52.93,88.32 52.92,88.32
N$41
  Bottom 0.152: U$34.IP-1 74.57,87.78 74.57,87.82
  Bottom 1.8: U$39.P$2 74.45,89.43 74.52,89.36 74.52,87.82 74.57,87.82 U$34.IP-2
N$42
  Top 0.254: U$31.VIOUT 93.06,102.06 93.1,102.1 93,102.2 88.3,102.2 83.06,96.96 83.06,94.76 79.45,91.14 79.45,88.75 12.15,88.75 U$36.IN7
N$43  (via drill 0.35)
  Top 0.254: v10.5,89.5 12.05,89.5 U$36.IN6
  Bottom 0.254: U$35.VIOUT 93.06,81.47 92.48,80.88 92.23,80.88 90.76,79.4 13.7,79.4 12.3,80.8 12.3,88.3 10.6,88.3 10.5,88.4 v10.5,89.5
N$45
  Top 0.254: U$30.VIOUT 72.56,101.94 72.5,102 68.3,102 64.4,98.1 64.4,94.6 59.93,90.12 U$36.IN5
N$46
  Bottom 0.152: U$32.IP-1 35.56,87.78 35.82,88.56
  Bottom 1.8: U$37.P$2 35.75,88.63 35.82,88.56 35.82,87.72 U$32.IP-2
N$47
  Bottom 0.152: U$35.IP-1 94.38,88.09 94.42,88.12
  Bottom 1.8: U$40.P$2 94.42,90.72 94.42,88.12 U$35.IP-2
N$48  (via drill 0.35)
  Top 0.254: U$36.IN2 11.88,92.27 11.51,92.27 11.35,92.43 11.35,92.75 v10.5,93.6
  Bottom 0.254: U$33.VIOUT 50.88,82.4 50.88,81.86 49.26,80.24 14.05,80.24 13.19,81.1 13.19,90.52 13.21,90.53 13.21,90.87 10.5,93.58 v10.5,93.6
N$49
  Top 0.254: U$36.IN1 23.43,92.72 24.9,94.2 24.9,100.4 26.6,102.1 32.4,102.1 32.47,102.03 U$28.VIOUT
N$50  (via drill 0.35)
  Top 0.254: U$36.IN0 10.5,94.95 v10.5,95.7
  Bottom 0.152: U$32.VIOUT 34.34,82.45 34.34,81.69 34.3,81.7
  Bottom 0.254: v10.5,95.7 10.5,94.53 13.61,91.42 13.61,90.36 13.6,90.35 13.6,81.27 14.22,80.65 32.4,80.65 33.25,80.65 34.3,81.7
N$51
  Bottom 1.8: U$37.P$1 32.8,90.66 U$24.RED
N$52
  Bottom 1.8: U$38.P$1 50.17,90.47 49.55,90.47 46.54,87.46 U$25.RED
N$53
  Bottom 1.8: U$26.RED 67.34,86.64 U$39.P$1
N$54
  Bottom 1.8: U$27.RED 86.74,86.34 U$40.P$1
N$55
  Top 1.8: U$20.RED 18.5,96.6 U$41.P$1
N$56
  Top 1.8: U$21.RED U$42.P$1
N$57
  Top 0.152: U$43.P$1 56.89,96.32 62.53,96.32 U$22.RED
N$58
  Top 1.8: U$23.RED 81.56,95.9 U$44.P$1
N$59  (via drill 0.35)
  Top 0.152: v5.23,89.46 5.23,89.47
  Top 0.254: U$36.A0 5.23,89.47 3.78,89.47 R6.2
  Bottom 0.152: v5.23,89.46 7.52,87.17 9.5,87.17 R5.1
N$59  (2 unrouted)
N$60
  Top 0.254: R3.2 6.33,86.81 U$36.A1 7.23,88.83 7.4,89 7.4,95.6 7.15,95.85 R4.2
N$60  (2 unrouted)
N$61
  Top 0.152: U$31.IP+2 93.01,95.25 92.55,95.25 U$31.IP+1
  Top 1.8: U$23.BLACK 91.08,96 U$31.IP+1

## Text on the board
tPlace: Eddy ESC Board | The Underwater Robotics Team / Center for Automotive Research